# Altium PCB gecko3.PcbDoc (part 6 of 8)
Units mm, origin at the board's own origin, x right, y up, seen from the top; angles counter-clockwise.
Board outline 85.5 x 54.02 mm, 10 copper layers (Top Layer, MidLayer1, 1.2 & 2.5V Plane, GND Plane1, DDR layer 1, 3.3V Plane, DDR layer 2, GND Plane2, MidLayer2, Bottom Layer), stack 1.39 mm thick; 295 components, 567 nets, 2310 pads, 1568 vias.
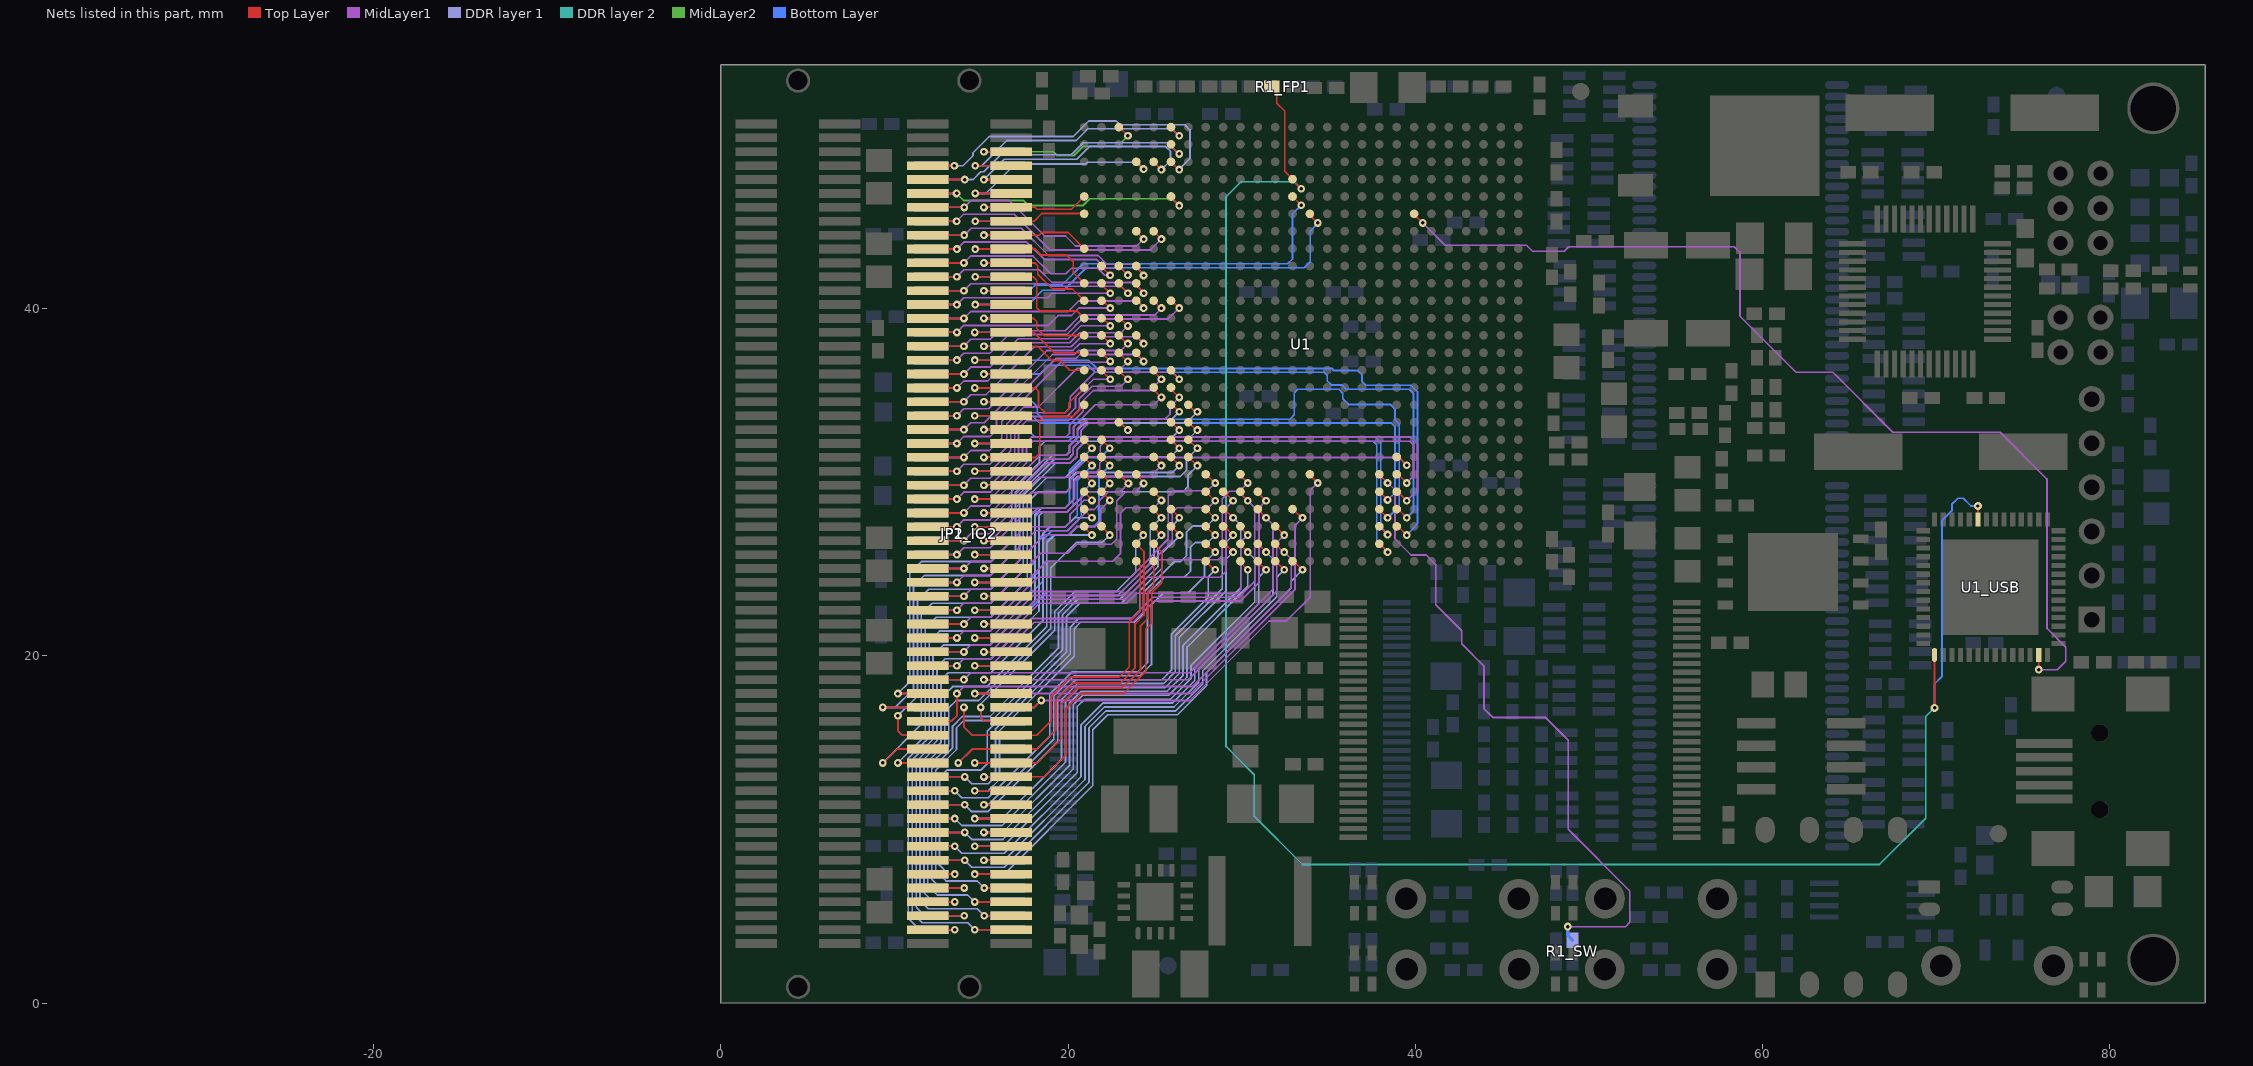
[diagram p14: the nets of this part, all layers, seen from the top]

## Via types
v1: diameter 0.45, hole 0.2, Top Layer to Bottom Layer, tented both sides, 1470 vias
v2: diameter 0.45, hole 0.2, Top Layer to Bottom Layer, tented bottom, 62 vias
v3: diameter 0.35, hole 0.15, Top Layer to MidLayer1, tented both sides, 26 vias
v4: diameter 0.45, hole 0.2, MidLayer2 to Bottom Layer, tented both sides, 10 vias

## Nets (pads, with @x,y where several pads share a name; then routed paths per layer and width w, separated by ;. In a path a pad name is that pad's centre, name@x,y a point inside that pad or via, vN(x,y) a via of type N, cw(c..) or ccw(c..) an arc to the next point about the centre after c; other vN are vias at no path point) (continued)
GPIO2_3: JP1_IO2.6 JP2_IO2.6 U1.AF24 | length 12.5
  Top Layer w0.1: v1(15.15,49.025) JP1_IO2.6@16.718,49.026 JP1_IO2.6@16.718,49.026 ; U1.AF24@22.927,50.449 22.951,50.449 v1(23.45,49.95)
  MidLayer2 w0.1: v1(15.15,49.025) 19.15,49.025 19.375,48.8 20.325,48.8 20.875,49.35 22.85,49.35 v1(23.45,49.95)
  Bottom Layer w0.1: v1(15.15,49.025) 16.517,49.025 JP2_IO2.6@16.518,49.026
GPIO2_4: JP1_IO2.7 JP2_IO2.7 U1.AD21 | length 21
  Top Layer w0.1: U1.AD21@25.927,48.448 v1@26.375,48
  Top Layer w0.15: JP1_IO2.7@11.918,48.226 v1(13.45,48.225)
  DDR layer 1 w0.1: v1(13.45,48.225) 13.95,48.225 14.525,48.8 14.525,48.975 15.452,49.903 20.303,49.903 21.2,50.8 22.775,50.8 23,50.575 26.725,50.575 27.025,50.275 27.025,48.65 v1@26.375,48
  Bottom Layer w0.15: JP2_IO2.7@12.118,48.226 v1(13.45,48.225)
  other v1: 26.4,48
GPIO2_5: JP1_IO2.8 JP2_IO2.8 U1.AF21 | length 17.4
  Top Layer w0.1: v1(14.65,48.225) JP1_IO2.8@16.718,48.226 ; U1.AF21@25.927,50.449 25.927,50.398 v1@26.375,49.95
  DDR layer 1 w0.1: v1(14.65,48.225) 15.025,48.225 16.478,49.678 20.478,49.678 21.15,50.35 25.975,50.35 v1@26.375,49.95
  Bottom Layer w0.1: v1(14.65,48.225) JP2_IO2.8@16.518,48.226
  other v1: 26.4,49.95
GPIO2_6: JP1_IO2.9 JP2_IO2.9 U1.AE21 | length 18.3
  Top Layer w0.1: JP1_IO2.9@11.918,47.426 v1(14.05,47.425) ; U1.AE21@25.927,49.449 25.927,49.373 v1(26.4,48.9)
  DDR layer 1 w0.1: v1(14.05,47.425) 14.525,47.425 14.975,47.875 15.15,47.875 16.125,48.85 20.175,48.85 20.875,49.55 25.725,49.55 v1@26.375,48.9
  Bottom Layer w0.1: JP2_IO2.9@12.118,47.426 v1(14.05,47.425)
GPIO2_7: JP1_IO2.10 JP2_IO2.10 U1.AD22 | length 16.5
  Top Layer w0.1: U1.AD22@24.927,48.448 v1(25.375,48) v1@25.375,48.001 ; v1@25.399,48.025 v1@25.425,48
  Top Layer w0.15: v1(15.15,47.425) JP1_IO2.10@16.718,47.426
  DDR layer 1 w0.1: v1(15.15,47.425) 16.325,48.6 20.5,48.6 21.225,49.325 25.632,49.325 25.9,49.057 25.9,48.525 v1(25.375,48)
  Bottom Layer w0.15: v1(15.15,47.425) JP2_IO2.10@16.518,47.426
GPIO2_8: JP1_IO2.11 JP2_IO2.11 U1.AB21 | length 17.3
  Top Layer w0.1: JP1_IO2.11@11.918,46.626 JP1_IO2.11@11.918,46.626 v1(13.575,46.625) ; U1.AB21@25.927,46.449 25.927,46.398 v1(26.4,45.925)
  MidLayer2 w0.1: v1(13.575,46.625) 13.975,46.225 17.425,46.225 17.725,45.925 20.85,45.925 21.25,46.325 26,46.325 v1(26.4,45.925)
  Bottom Layer w0.1: JP2_IO2.11@12.118,46.626 12.119,46.625 v1(13.575,46.625)
GPIO2_9: JP1_IO2.12 JP2_IO2.12 U1.AD23 | length 15.1
  Top Layer w0.1: v1(14.65,46.625) JP1_IO2.12@16.718,46.626 ; U1.AD23@23.927,48.449 23.931,48.449 v1@24.35,48.03
  DDR layer 1 w0.1: v1(14.65,46.625) 15.25,46.625 16.95,48.325 21.025,48.325 21.128,48.428 23.947,48.428 v1(24.35,48.025)
  Bottom Layer w0.1: v1(14.65,46.625) JP2_IO2.12@16.518,46.626
GPIO2_10: JP1_IO2.13 JP2_IO2.13 U1.Y23 | length 16.4
  Top Layer w0.1: JP1_IO2.13@11.918,45.826 JP1_IO2.13@11.918,45.826 v1(14.025,45.825) ; U1.Y23@23.927,44.449 23.927,44.423 v1(24.35,44)
  MidLayer1 w0.1: v1(14.025,45.825) 14.425,46.225 16.6,46.225 18.647,44.178 19.852,44.178 20.43,43.6 23.95,43.6 v1(24.35,44)
  Bottom Layer w0.1: JP2_IO2.13@12.118,45.826 12.119,45.825 v1(14.025,45.825)
GPIO2_11: JP1_IO2.14 JP2_IO2.14 U1.AB26 | length 7.5
  Top Layer w0.1: v1(15.15,45.825) v1(15.15,45.825) JP1_IO2.14@16.718,45.826 16.719,45.825 18.1,45.825 18.209,45.716 20.194,45.716 U1.AB26@20.927,46.449
  Bottom Layer w0.1: v1(15.15,45.825) 16.517,45.825 JP2_IO2.14@16.518,45.826
GPIO2_12: JP1_IO2.15 JP2_IO2.15 U1.Y22 | length 16.9
  Top Layer w0.1: JP1_IO2.15@11.918,45.026 JP1_IO2.15@11.918,45.026 v1(13.575,45.025) ; U1.Y22@24.927,44.449 v1(25.375,44) ; U1.Y22@24.927,44.449 U1.Y22@24.976,44.449
  MidLayer1 w0.1: v1(13.575,45.025) 13.975,45.425 16.9,45.425 18.95,43.375 24.75,43.375 v1(25.375,44)
  Bottom Layer w0.1: JP2_IO2.15@12.118,45.026 12.119,45.025 v1(13.575,45.025)
GPIO2_13: JP1_IO2.16 JP2_IO2.16 U1.AA26 | length 8.3
  Top Layer w0.1: v1(14.65,45.025) 14.651,45.026 JP1_IO2.16@16.718,45.026 16.719,45.025 18.05,45.025 18.5,45.475 U1.AA26@20.952,45.475 ; U1.AA26@20.927,45.449 U1.AA26@20.952,45.449
  Bottom Layer w0.1: v1(14.65,45.025) JP2_IO2.16@16.475,45.025
GPIO2_14: JP1_IO2.17 JP2_IO2.17 U1.V23 | length 16.4
  Top Layer w0.1: JP1_IO2.17@11.918,44.226 JP1_IO2.17@11.918,44.226 v1(14.025,44.225) ; U1.V23@23.902,42.398 v1@24.39,41.91
  MidLayer1 w0.1: v1(14.025,44.225) 14.425,44.625 17.3,44.625 18.872,43.053 21.727,43.053 22.23,42.55 23.75,42.55 v1@24.39,41.91
  Bottom Layer w0.1: v1(14.025,44.225) JP2_IO2.17@12.119,44.225 ; JP2_IO2.17@12.118,44.226 JP2_IO2.17@12.119,44.225
  other v1: 24.35,41.9
GPIO2_15: JP1_IO2.18 JP2_IO2.18 U1.W26 | length 7.6
  Top Layer w0.1: v1(15.15,44.225) v1(15.15,44.225) JP1_IO2.18@16.718,44.226 ; U1.W26@20.927,43.449 20.001,44.375 18.475,44.375 18.325,44.225 JP1_IO2.18@16.719,44.225 ; JP1_IO2.18@16.718,44.226 JP1_IO2.18@16.719,44.225
  Bottom Layer w0.1: v1(15.15,44.225) v1(15.15,44.225) JP2_IO2.18@16.518,44.226
GPIO2_16: JP1_IO2.19 JP2_IO2.19 U1.V24 | length 14.7
  Top Layer w0.1: JP1_IO2.19@11.918,43.426 JP1_IO2.19@11.918,43.426 v1(13.6,43.425) ; U1.V24@22.927,42.448 v1(23.45,41.925)
  MidLayer1 w0.1: v1@13.625,43.45 14,43.825 17.625,43.825 18.622,42.828 21.627,42.828 22.13,42.325 23.05,42.325 v1(23.45,41.925)
  Bottom Layer w0.1: JP2_IO2.19@12.118,43.426 v1@13.599,43.426
GPIO2_17: JP1_IO2.20 JP2_IO2.20 U1.U26 | length 9.3
  Top Layer w0.1: v1(14.65,43.425) 14.651,43.426 18.099,43.426 18.45,43.075 19.925,43.075 20.3,42.7 20.3,42.076 U1.U26@20.927,41.449
  Bottom Layer w0.1: v1(14.65,43.425) JP2_IO2.20@16.517,43.425 ; JP2_IO2.20@16.517,43.425 JP2_IO2.20@16.518,43.426
GPIO2_18: JP1_IO2.21 JP2_IO2.21 U1.V25 | length 14
  Top Layer w0.1: JP1_IO2.21@11.918,42.626 JP1_IO2.21@11.918,42.626 v1(14,42.625) ; U1.V25@21.927,42.398 v1(22.415,41.91)
  MidLayer1 w0.1: v1(14,42.625) 14.4,43.025 17.975,43.025 19,42 19.875,42 20.2,42.325 21.7,42.325 22.115,41.91 v1(22.415,41.91)
  Bottom Layer w0.1: v1(14,42.625) JP2_IO2.21@12.119,42.625 ; JP2_IO2.21@12.118,42.626 JP2_IO2.21@12.119,42.625
GPIO2_19: JP1_IO2.22 JP2_IO2.22 U1.T26 | length 8.3
  Top Layer w0.1: v1(15.15,42.625) JP1_IO2.22@16.718,42.626 JP1_IO2.22@16.718,42.626 18.074,42.626 18.25,42.45 18.25,41.974 19.099,41.125 20.251,41.125 U1.T26@20.927,40.449
  Bottom Layer w0.1: v1(15.15,42.625) JP2_IO2.22@16.518,42.626
GPIO2_20: JP1_IO2.23 JP2_IO2.23 U1.U23 | length 15.5
  Top Layer w0.1: JP1_IO2.23@11.918,41.826 JP1_IO2.23@11.918,41.826 v1(13.6,41.825) ; U1.U23@23.927,41.449 23.927,41.348 v1@24.4,40.875
  MidLayer1 w0.1: v1(13.6,41.825) 14,42.225 18.35,42.225 19.075,41.5 23.775,41.5 v1@24.4,40.875
  Bottom Layer w0.1: JP2_IO2.23@12.118,41.826 12.119,41.825 v1(13.6,41.825)
  other v1: 24.35,40.875
GPIO2_21: JP1_IO2.24 JP2_IO2.24 U1.R26 | length 10.1
  Top Layer w0.1: v1(14.65,41.825) 14.651,41.826 17.999,41.826 18.2,41.625 18.2,40.05 18.4,39.85 20.526,39.85 U1.R26@20.927,39.449
  Bottom Layer w0.1: v1(14.65,41.825) 14.651,41.826 JP2_IO2.24@16.518,41.826
GPIO2_22: JP1_IO2.25 JP2_IO2.25 U1.U24 | length 14.6
  Top Layer w0.1: JP1_IO2.25@11.918,41.026 JP1_IO2.25@11.918,41.026 v1(14,41.025) ; U1.U24@22.927,41.449 22.927,41.398 v1(23.45,40.875)
  MidLayer1 w0.1: v1(14,41.025) 14.4,41.425 18.825,41.425 18.975,41.275 23.05,41.275 v1(23.45,40.875)
  Bottom Layer w0.1: JP2_IO2.25@12.118,41.026 12.119,41.025 v1(14,41.025)
GPIO2_23: JP1_IO2.26 JP2_IO2.26 U1.AB14 | length 24.1
  Top Layer w0.1: v1(15.15,41.025) JP1_IO2.26@16.718,41.026 JP1_IO2.26@16.718,41.026 ; U1.AB14@32.926,46.449 v1(33.425,45.95)
  Bottom Layer w0.1: v1(15.15,41.025) 17.775,41.025 18.1,41.35 19.65,41.35 20.875,42.575 32.65,42.575 32.925,42.85 32.925,45.45 v1(33.425,45.95) ; JP2_IO2.26@16.518,41.026 JP2_IO2.26@16.518,41.026
GPIO2_24: JP1_IO2.27 JP2_IO2.27 U1.U25 | length 12.9
  Top Layer w0.1: JP1_IO2.27@11.918,40.226 JP1_IO2.27@11.918,40.226 v1(13.6,40.225) ; U1.U25@21.952,41.348 v1(22.425,40.875)
  MidLayer1 w0.1: v1(13.6,40.225) 14,40.625 18.825,40.625 19.075,40.875 v1(22.425,40.875)
  Bottom Layer w0.1: JP2_IO2.27@12.118,40.226 12.119,40.225 v1(13.6,40.225)
GPIO2_25: JP1_IO2.28 JP2_IO2.28 U1.AA13 | length 25.5
  Top Layer w0.1: v1(14.65,40.225) 14.651,40.226 JP1_IO2.28@16.718,40.226 ; U1.AA13@33.927,45.449 33.927,45.373 v1(34.375,44.925)
  Bottom Layer w0.1: v1(14.65,40.225) 17.7,40.225 18.525,41.05 19.75,41.05 21.05,42.35 33.6,42.35 33.95,42.7 33.95,44.45 v1(34.375,44.925) ; JP2_IO2.28@16.518,40.226 JP2_IO2.28@16.518,40.226
GPIO2_26: JP1_IO2.29 JP2_IO2.29 U1.T23 | length 15.6
  Top Layer w0.1: JP1_IO2.29@11.918,39.426 JP1_IO2.29@11.918,39.426 v1(14,39.425) ; U1.T23@23.927,40.449 23.976,40.449 v1@24.4,40.025
  MidLayer1 w0.1: v1(14,39.425) 14.4,39.825 20,39.825 20.6,40.425 24,40.425 v1@24.4,40.025
  Bottom Layer w0.1: JP2_IO2.29@12.118,39.426 12.119,39.425 v1(14,39.425)
  other v1: 24.35,40.025
GPIO2_27: JP1_IO2.30 JP2_IO2.30 U1.P26 | length 7.8
  Top Layer w0.1: v1(15.15,39.425) JP1_IO2.30@16.718,39.426 JP1_IO2.30@16.718,39.426 18.024,39.426 18.2,39.25 18.2,38.85 18.601,38.449 U1.P26@20.927,38.449
  Bottom Layer w0.1: v1(15.15,39.425) JP2_IO2.30@16.518,39.426
GPIO2_28: JP1_IO2.31 JP2_IO2.31 U1.T25 | length 13.2
  Top Layer w0.1: JP1_IO2.31@11.918,38.626 JP1_IO2.31@11.918,38.626 v1(13.6,38.625) ; U1.T25@21.927,40.449 22.001,40.449 v1(22.425,40.025)
  MidLayer1 w0.1: v1(13.6,38.625) 14,39.025 18.85,39.025 19.425,39.6 20.2,39.6 20.625,40.025 v1(22.425,40.025)
  Bottom Layer w0.1: JP2_IO2.31@12.118,38.626 12.119,38.625 v1(13.6,38.625)
GPIO2_29: JP1_IO2.32 JP2_IO2.32 U1.N26 | length 8.7
  Top Layer w0.1: v1(14.623,38.625) 14.649,38.626 JP1_IO2.32@16.718,38.626 16.719,38.625 18.025,38.625 19.201,37.449 U1.N26@20.927,37.449
  Bottom Layer w0.1: v1(14.623,38.625) 16.517,38.625 JP2_IO2.32@16.518,38.626
GPIO2_30: JP1_IO2.33 JP2_IO2.33 U1.T22 | length 17
  Top Layer w0.1: JP1_IO2.33@11.918,37.826 JP1_IO2.33@11.918,37.826 v1(14,37.825) ; U1.T22@25.001,40.449 U1.T22@24.927,40.449 25.351,40.025 v1@25.425,40.025
  MidLayer1 w0.1: v1(14,37.825) 14.4,38.225 15.525,38.225 16.025,38.725 19.832,38.725 20.732,39.625 25,39.625 25.398,40 v1@25.425,40.025
  Bottom Layer w0.1: JP2_IO2.33@12.118,37.826 12.119,37.825 v1(14,37.825)
  other v1: 25.375,40.025
GPIO2_31: JP1_IO2.34 JP2_IO2.34 U1.M26 | length 7.8
  Top Layer w0.1: v1(15.15,37.825) JP1_IO2.34@16.718,37.826 JP1_IO2.34@16.718,37.826 JP1_IO2.34@16.762,37.782 ; JP1_IO2.34@16.719,37.825 18.25,37.825 19.075,37 19.55,37 20.101,36.449 U1.M26@20.927,36.449
  Bottom Layer w0.1: v1(15.15,37.825) JP2_IO2.34@16.518,37.826
GPIO2_32: JP1_IO2.35 JP2_IO2.35 U1.T21 | length 17.9
  Top Layer w0.1: JP1_IO2.35@11.918,37.026 JP1_IO2.35@11.918,37.026 v1(13.6,37.025) ; U1.T21@25.927,40.449 25.976,40.449 v1(26.4,40.025)
  MidLayer1 w0.1: v1(13.6,37.025) 14,37.425 15.5,37.425 16.575,38.5 19.925,38.5 20.825,39.4 25.775,39.4 v1(26.4,40.025)
  Bottom Layer w0.1: JP2_IO2.35@12.118,37.026 12.119,37.025 v1(13.6,37.025)
GPIO2_33: JP1_IO2.36 JP2_IO2.36 U1.C8 | length 37.9
  Top Layer w0.1: v1(14.625,37.025) JP1_IO2.36@16.718,37.026 JP1_IO2.36@16.718,37.026 ; U1.C8@38.927,27.449 39.001,27.449 v1(39.5,26.95)
  Bottom Layer w0.1: v1(14.625,37.025) 16.517,37.025 JP2_IO2.36@16.518,37.026 ; JP2_IO2.36@16.494,37.05 16.519,37.025 21.175,37.025 21.65,36.55 35.175,36.55 35.3,36.425 36.675,36.425 36.925,36.175 36.925,35.8 37.15,35.575 39.75,35.575 40.125,35.2 40.125,27.6 v1(39.5,26.95)
GPIO2_34: JP1_IO2.37 JP2_IO2.37 U1.R25 | length 14.2
  Top Layer w0.1: JP1_IO2.37@11.918,36.226 11.919,36.225 v1(14,36.225) ; U1.R25@21.927,39.449 21.976,39.449 v1(22.425,39)
  MidLayer1 w0.1: v1(14,36.225) 14.4,36.625 15.5,36.625 17.13,38.255 19.998,38.255 20.743,39 v1(22.425,39)
  Bottom Layer w0.1: JP2_IO2.37@12.118,36.226 12.119,36.225 v1(14,36.225)
GPIO2_35: JP1_IO2.38 JP2_IO2.38 U1.D8 | length 35.5
  Top Layer w0.1: v1(15.15,36.225) 16.717,36.225 JP1_IO2.38@16.718,36.226 ; U1.D8@38.927,28.449 39.001,28.449 v1(39.5,27.95)
  Bottom Layer w0.1: v1(15.15,36.225) 18.375,36.225 18.875,36.725 21.157,36.725 21.557,36.325 34.75,36.325 34.925,36.15 34.925,35.825 35.15,35.6 35.775,35.6 36.025,35.35 39.65,35.35 39.9,35.1 39.9,28.35 v1(39.5,27.95) ; JP2_IO2.38@16.518,36.226 JP2_IO2.38@16.519,36.225
GPIO2_36: JP1_IO2.39 JP2_IO2.39 U1.R24 | length 15.2
  Top Layer w0.1: JP1_IO2.39@11.918,35.426 11.919,35.425 v1(13.6,35.425) ; U1.R24@22.927,39.449 22.976,39.449 v1@23.425,39
  MidLayer1 w0.1: v1(13.6,35.425) 14,35.825 15.375,35.825 17.578,38.028 20.089,38.028 20.661,38.6 23.05,38.6 v1(23.45,39)
  Bottom Layer w0.1: JP2_IO2.39@12.118,35.426 12.119,35.425 v1(13.6,35.425)
GPIO2_37: JP1_IO2.40 JP2_IO2.40 U1.L26 | length 10.1
  Top Layer w0.1: v1(14.625,35.425) 15.126,35.426 JP1_IO2.40@16.718,35.426 16.719,35.425 18.1,35.425 18.3,35.225 18.3,34.375 18.675,34 19.85,34 20.05,34.2 20.05,34.572 U1.L26@20.927,35.449
  Bottom Layer w0.1: v1(14.625,35.425) 16.517,35.425 JP2_IO2.40@16.518,35.426
GPIO2_38: JP1_IO2.41 JP2_IO2.41 U1.P23 | length 16.7
  Top Layer w0.1: JP1_IO2.41@11.918,34.626 11.919,34.625 v1(14,34.625) ; U1.P23@23.927,38.448 v1@24.4,37.975
  MidLayer1 w0.1: v1(14,34.625) 14.4,35.025 15.275,35.025 18.053,37.803 20.182,37.803 20.755,38.375 23.95,38.375 v1(24.35,37.975)
  Bottom Layer w0.1: v1(14,34.625) JP2_IO2.41@12.119,34.625 ; JP2_IO2.41@12.118,34.626 JP2_IO2.41@12.119,34.625
GPIO2_39: JP1_IO2.42 JP2_IO2.42 U1.D9 | length 35.4
  Top Layer w0.1: v1(15.15,34.625) 15.126,34.626 JP1_IO2.42@16.718,34.626 ; U1.D9@37.927,28.449 37.927,28.423 v1(38.4,27.95)
  Bottom Layer w0.1: v1(15.15,34.625) JP2_IO2.42@16.517,34.625 ; v1(38.4,27.95) 39.075,28.625 39.075,33.35 38.825,33.6 38.825,34.2 38.55,34.475 36.15,34.475 35.825,34.8 35.825,35.125 35.6,35.35 33.225,35.35 33.025,35.15 33.025,33.875 32.778,33.628 18.547,33.628 18.225,33.95 18.225,34.35 17.95,34.625 16.519,34.625 JP2_IO2.42@16.518,34.626 ; JP2_IO2.42@16.517,34.625 JP2_IO2.42@16.518,34.626
GPIO2_40: JP1_IO2.43 JP2_IO2.43 U1.P25 | length 14.4
  Top Layer w0.1: JP1_IO2.43@11.918,33.826 11.919,33.825 v1(13.6,33.825) ; U1.P25@21.927,38.449 21.951,38.449 v1(22.425,37.975)
  MidLayer1 w0.1: v1(13.6,33.825) 14,34.225 15.425,34.225 18.778,37.578 20.277,37.578 20.675,37.975 v1(22.425,37.975)
  Bottom Layer w0.1: v1(13.6,33.825) JP2_IO2.43@12.119,33.825 ; JP2_IO2.43@12.118,33.826 JP2_IO2.43@12.119,33.825
GPIO2_41: JP1_IO2.44 JP2_IO2.44 U1.E9 | length 31.6
  Top Layer w0.1: v1@14.625,33.826 JP1_IO2.44@16.718,33.826 ; U1.E9@37.927,29.449 v1(38.4,28.975)
  Bottom Layer w0.1: v1(14.625,33.825) JP2_IO2.44@16.518,33.826 16.519,33.825 17.95,33.825 18.372,33.403 38.622,33.403 38.825,33.2 38.825,29.375 v1(38.4,28.975)
GPIO2_42: JP1_IO2.45 JP2_IO2.45 U1.P24 | length 16.1
  Top Layer w0.1: JP1_IO2.45@11.918,33.026 11.919,33.025 v1(14,33.025) ; U1.P24@22.927,38.449 23.401,37.975 v1@23.425,37.975
  MidLayer1 w0.1: v1(14,33.025) 14.4,33.425 15.175,33.425 19.1,37.35 20.368,37.35 20.593,37.575 23.025,37.575 v1@23.425,37.975
  Bottom Layer w0.1: v1(14,33.025) JP2_IO2.45@12.119,33.025 ; JP2_IO2.45@12.118,33.026 JP2_IO2.45@12.119,33.025
  other v1: 23.45,37.975
GPIO2_43: JP1_IO2.46 JP2_IO2.46 U1.C9 | length 30.9
  Top Layer w0.1: v1(15.15,33.025) 16.717,33.025 JP1_IO2.46@16.718,33.026 ; U1.C9@37.927,27.449 v1(38.4,26.975)
  Bottom Layer w0.1: v1@15.151,33.026 17.649,33.026 18.075,32.6 37.675,32.6 38,32.275 38,27.4 v1(38.4,26.975)
GPIO2_44: JP1_IO2.47 JP2_IO2.47 U1.N23 | length 17.3
  Top Layer w0.1: JP1_IO2.47@11.918,32.226 11.919,32.225 v1(13.6,32.225) ; U1.N23@23.927,37.449 23.927,37.423 v1@24.4,36.95
  MidLayer1 w0.1: v1(13.6,32.225) 14,32.625 15.525,32.625 15.875,32.975 15.875,33.675 19.325,37.125 20.461,37.125 20.686,37.35 23.95,37.35 v1(24.35,36.95)
  Bottom Layer w0.1: v1(13.6,32.225) JP2_IO2.47@12.119,32.225 ; JP2_IO2.47@12.118,32.226 JP2_IO2.47@12.119,32.225
GPIO2_45: JP1_IO2.48 JP2_IO2.48 U1.B9 | length 32.5
  Top Layer w0.1: JP1_IO2.48@16.717,32.225 v1(14.625,32.225) ; U1.B9@37.927,26.449 v1(38.4,25.975) ; v1(14.625,32.225) v1@14.626,32.226
  Bottom Layer w0.1: v1(14.625,32.225) 16.517,32.225 16.642,32.35 37.575,32.35 37.775,32.15 37.775,26.625 v1(38.4,25.975)
GPIO2_46: JP1_IO2.49 JP2_IO2.49 U1.N25 | length 16
  Top Layer w0.1: JP1_IO2.49@11.918,31.426 11.919,31.425 v1(14,31.425) ; U1.N25@21.927,37.449 v1(22.425,36.95)
  MidLayer1 w0.1: v1(14,31.425) 14.4,31.825 15.475,31.825 16.175,32.525 16.175,33.5 19.575,36.9 22.375,36.9 v1(22.425,36.95)
  Bottom Layer w0.1: JP2_IO2.49@12.118,31.426 12.119,31.425 v1(14,31.425)
GPIO2_47: JP1_IO2.50 JP2_IO2.50 U1.K26 | length 9.6
  Top Layer w0.1: v1(15.15,31.425) 15.125,31.45 16.694,31.45 16.719,31.425 18.125,31.425 18.375,31.675 18.375,33.575 18.575,33.775 20.275,33.775 20.927,34.427 U1.K26@20.927,34.449
  Bottom Layer w0.1: v1(15.15,31.425) JP2_IO2.50@16.518,31.426
GPIO2_48: JP1_IO2.51 JP2_IO2.51 U1.N24 | length 17.1
  Top Layer w0.1: JP1_IO2.51@11.918,30.626 11.919,30.625 v1(13.6,30.625) ; U1.N24@22.952,37.423 v1@23.425,36.95
  MidLayer1 w0.1: v1(13.6,30.625) 14,31.025 15.5,31.025 16.475,32 16.475,33.35 17.45,34.325 18.3,34.325 20.525,36.55 23.05,36.55 v1(23.45,36.95)
  Bottom Layer w0.1: JP2_IO2.51@12.118,30.626 12.119,30.625 v1(13.6,30.625)
GPIO2_49: JP1_IO2.52 JP2_IO2.52 U1.M21 | length 20.2
  Top Layer w0.1: v1(14.625,30.625) 16.717,30.625 JP1_IO2.52@16.718,30.626 ; U1.M21@25.927,36.449 25.927,36.398 v1(26.4,35.925)
  MidLayer1 w0.1: v1(14.625,30.625) 15.525,30.625 16.7,31.8 16.7,33.257 17.443,34 19.825,34 20.127,34.302 20.127,34.907 21.545,36.325 26,36.325 v1(26.4,35.925)
  Bottom Layer w0.1: v1(14.625,30.625) 16.517,30.625 JP2_IO2.52@16.518,30.626
GPIO2_50: JP1_IO2.53 JP2_IO2.53 U1.M25 | length 16.9
  Top Layer w0.1: JP1_IO2.53@11.918,29.826 11.919,29.825 v1(14,29.825) ; U1.M25@21.927,36.449 21.927,36.423 v1(22.425,35.925)
  MidLayer1 w0.1: v1(14,29.825) 14.4,30.225 15.5,30.225 16.925,31.65 16.925,33.164 17.536,33.775 19.925,33.775 20.425,34.275 20.425,34.886 21.464,35.925 v1(22.425,35.925)
  Bottom Layer w0.1: JP2_IO2.53@12.118,29.826 12.119,29.825 v1(14,29.825)
GPIO2_51: JP1_IO2.54 JP2_IO2.54 U1.M24 | length 15.8
  Top Layer w0.1: v1(15.15,29.825) 16.717,29.825 JP1_IO2.54@16.718,29.826 ; U1.M24@22.927,36.449 22.927,36.423 v1@23.425,35.925
  MidLayer1 w0.1: v1(15.15,29.825) 15.174,29.849 15.549,29.849 17.15,31.45 17.15,33.07 17.63,33.55 20.025,33.55 20.65,34.175 20.65,34.793 21.382,35.525 23.05,35.525 v1(23.45,35.925)
  Bottom Layer w0.1: v1(15.15,29.825) 16.517,29.825 JP2_IO2.54@16.518,29.826
GPIO2_52: JP1_IO2.55 JP2_IO2.55 U1.M22 | length 19.6
  Top Layer w0.1: JP1_IO2.55@11.918,29.026 JP1_IO2.55@11.918,29.026 v1(13.6,29.025) ; U1.M22@24.927,36.449 24.927,36.373 v1(25.375,35.925)
  MidLayer1 w0.1: v1(13.6,29.025) 14,29.425 15.525,29.425 17.375,31.275 17.375,32.075 17.9,32.6 19.875,32.6 20.075,32.8 20.075,33.275 20.875,34.075 20.875,34.7 21.45,35.275 24.725,35.275 v1(25.375,35.925)
  Bottom Layer w0.1: JP2_IO2.55@12.118,29.026 12.119,29.025 v1(13.6,29.025)
GPIO2_53: JP1_IO2.56 JP2_IO2.56 U1.L22 | length 18.7
  Top Layer w0.1: v1(14.625,29.025) JP1_IO2.56@16.718,29.026 JP1_IO2.56@16.718,29.026 ; U1.L22@24.927,35.449 24.927,35.323 v1(25.375,34.875)
  MidLayer1 w0.1: v1(14.625,29.025) 15.525,29.025 17.6,31.1 17.6,31.982 17.968,32.35 20,32.35 20.3,32.65 20.3,33.175 21.575,34.45 24.95,34.45 v1(25.375,34.875)
  Bottom Layer w0.1: v1(14.625,29.025) JP2_IO2.56@16.518,29.026
GPIO2_54: JP1_IO2.57 JP2_IO2.57 U1.L21 | length 20.7
  Top Layer w0.1: JP1_IO2.57@11.918,28.226 JP1_IO2.57@11.918,28.226 v1(14,28.225) ; U1.L21@25.927,35.449 25.927,35.348 v1(26.4,34.875)
  MidLayer1 w0.1: v1(14,28.225) 14.4,28.625 15.475,28.625 18.4,31.55 19.9,31.55 20.075,31.725 20.075,32.1 20.525,32.55 20.525,33.082 21.068,33.625 25.575,33.625 25.875,33.925 25.875,34.35 v1(26.4,34.875)
  Bottom Layer w0.1: JP2_IO2.57@12.118,28.226 12.119,28.225 v1(14,28.225)
GPIO2_55: JP1_IO2.58 JP2_IO2.58 U1.J24 | length 14.8
  Top Layer w0.1: v1(15.15,28.225) JP1_IO2.58@16.718,28.226 JP1_IO2.58@16.718,28.226 ; U1.J24@22.927,33.449 22.976,33.449 v1@23.425,33
  MidLayer1 w0.1: v1(15.15,28.225) 15.525,28.225 18.625,31.325 20.025,31.325 20.3,31.6 20.3,32 20.75,32.45 20.75,32.989 21.161,33.4 23.05,33.4 v1(23.45,33)
  Bottom Layer w0.1: v1(15.15,28.225) 16.517,28.225 JP2_IO2.58@16.518,28.226
GPIO2_56: JP1_IO2.59 JP2_IO2.59 U1.E8 | length 36.6
  Top Layer w0.1: JP1_IO2.59@11.918,27.426 JP1_IO2.59@11.918,27.426 v1(13.6,27.425) ; U1.E8@38.927,29.449 38.976,29.449 v1(39.5,28.925)
  MidLayer1 w0.1: v1(13.6,27.425) 14,27.825 15.5,27.825 18.775,31.1 20.125,31.1 20.525,31.5 20.525,31.9 21.225,32.6 39.75,32.6 40.125,32.225 40.125,29.55 v1(39.5,28.925)
  Bottom Layer w0.1: JP2_IO2.59@12.118,27.426 12.119,27.425 v1(13.6,27.425)
GPIO2_57: JP1_IO2.60 JP2_IO2.60 U1.F8 | length 34.8
  Top Layer w0.1: v1(14.625,27.425) JP1_IO2.60@16.718,27.426 JP1_IO2.60@16.718,27.426 ; U1.F8@38.927,30.449 39.001,30.449 v1(39.5,29.95)
  MidLayer1 w0.1: v1(14.625,27.425) 15.475,27.425 18.325,30.275 19.95,30.275 21.125,31.45 21.675,31.45 21.85,31.625 21.85,32.075 22.128,32.353 39.677,32.353 39.9,32.13 39.9,30.375 v1(39.5,29.95)
  Bottom Layer w0.1: v1(14.625,27.425) JP2_IO2.60@16.518,27.426
GPIO2_58: JP1_IO2.61 JP2_IO2.61 U1.G8 | length 32.9
  Top Layer w0.1: JP1_IO2.61@11.892,26.6 JP1_IO2.61@11.918,26.626 ; JP1_IO2.61@11.918,26.626 v1(14,26.625) ; U1.G8@38.927,31.449 39.026,31.449 v1(39.5,30.975)
  MidLayer1 w0.1: v1(14,26.625) 14.4,27.025 15.475,27.025 17.85,29.4 19.875,29.4 20.15,29.675 20.15,30.157 20.543,30.55 21.6,30.55 21.825,30.775 21.825,31.1 22.15,31.425 39.05,31.425 v1(39.5,30.975)
  Bottom Layer w0.1: JP2_IO2.61@12.118,26.626 v1(14,26.625)
GPIO2_59: JP1_IO2.62 JP2_IO2.62 U1.G22 | length 16.3
  Top Layer w0.1: v1(15.15,26.625) JP1_IO2.62@16.718,26.626 JP1_IO2.62@16.718,26.626 ; U1.G22@24.927,31.449 v1@25.425,30.951
  MidLayer1 w0.1: v1(15.15,26.625) 15.55,26.625 17.425,28.5 19.825,28.5 20.375,29.05 20.375,30.064 20.636,30.325 24.75,30.325 v1(25.375,30.95)
  Bottom Layer w0.1: v1(15.15,26.625) 16.517,26.625 JP2_IO2.62@16.518,26.626
GPIO2_60: JP1_IO2.63 JP2_IO2.63 U1.F25 | length 14.4
  Top Layer w0.1: JP1_IO2.63@11.918,25.826 11.917,25.825 v1(13.6,25.825) ; U1.F25@21.927,30.449 v1@22.425,29.951
  MidLayer1 w0.1: v1(13.6,25.825) 14,26.225 15.525,26.225 17.575,28.275 19.925,28.275 21.1,29.45 21.925,29.45 v1(22.4,29.925)
  Bottom Layer w0.1: JP2_IO2.63@12.118,25.826 v1(13.6,25.825)
GPIO2_61: JP1_IO2.64 JP2_IO2.64 U1.H26 | length 14.4
  Top Layer w0.1: v1(14.625,25.825) JP1_IO2.64@16.718,25.826 JP1_IO2.64@16.718,25.826 ; U1.H26@20.927,32.449 20.927,32.398 v1(21.375,31.95)
  Bottom Layer w0.1: v1(14.625,25.825) 16.517,25.825 JP2_IO2.64@16.518,25.826 17.651,25.826 17.875,26.05 17.875,28.125 18.25,28.5 19.825,28.5 20.077,28.752 20.077,30.652 v1(21.375,31.95)
GPIO2_62: JP1_IO2.65 JP2_IO2.65 U1.E26 | length 13.9
  Top Layer w0.1: JP1_IO2.65@11.918,25.026 v1(14,25.025) ; U1.E26@20.914,29.436 v1@21.4,28.951
  MidLayer1 w0.1: v1(14,25.025) 14.4,25.425 15.55,25.425 17.55,27.425 19.85,27.425 20.116,27.691 20.116,28.148 20.918,28.95 v1(21.375,28.95)
  Bottom Layer w0.1: JP2_IO2.65@12.118,25.026 JP2_IO2.65@12.118,25.026 ; JP2_IO2.65@12.118,25.026 v1(14,25.025)
GPIO2_63: JP1_IO2.66 JP2_IO2.66 U1.H25 | length 15
  Top Layer w0.1: v1(15.15,25.025) v1(15.15,25.025) JP1_IO2.66@16.718,25.026 ; U1.H25@21.927,32.449 v1@22.425,31.951
  Bottom Layer w0.1: v1(15.15,25.025) JP2_IO2.66@16.518,25.026 JP2_IO2.66@16.518,25.026 17.7,25.025 18.1,25.425 18.1,28.025 18.35,28.275 19.925,28.275 20.302,28.652 20.302,30.559 21.143,31.4 21.85,31.4 v1(22.4,31.95)
GPIO2_64: JP1_IO2.67 JP2_IO2.67 U1.F24 | length 16.3
  Top Layer w0.1: JP1_IO2.67@11.918,24.226 11.917,24.225 v1(13.6,24.225) ; U1.F24@22.927,30.449 22.951,30.449 v1(23.475,29.925)
  MidLayer1 w0.1: v1(13.6,24.225) 14,24.625 15.55,24.625 18.125,27.2 19.975,27.2 21.2,28.425 21.5,28.425 21.771,28.696 21.771,28.896 22.325,29.45 23,29.45 v1(23.475,29.925)
  Bottom Layer w0.1: JP2_IO2.67@12.118,24.226 JP2_IO2.67@12.118,24.226 v1(13.6,24.225)
GPIO2_65: JP1_IO2.68 JP2_IO2.68 U1.G26 | length 14.6
  Top Layer w0.1: v1(14.625,24.225) JP1_IO2.68@16.719,24.225 ; U1.G26@20.914,31.436 v1@21.4,30.951 ; JP1_IO2.68@16.718,24.226 JP1_IO2.68@16.719,24.225
  Bottom Layer w0.1: v1(14.625,24.225) 17.7,24.225 18.325,24.85 18.325,26.775 18.975,27.425 19.85,27.425 20.527,28.102 20.527,30.102 v1(21.375,30.95) ; JP2_IO2.68@16.518,24.226 JP2_IO2.68@16.518,24.226
GPIO2_66: JP1_IO2.69 JP2_IO2.69 U1.E25 | length 15.8
  Top Layer w0.1: JP1_IO2.69@11.918,23.426 v1(14,23.425) ; U1.E25@21.927,29.449 v1@22.425,28.951 ; v1(14,23.425) v1(14,23.425)
  MidLayer1 w0.1: v1(14,23.425) 14.4,23.825 15.5,23.825 18.65,26.975 20.075,26.975 20.55,27.45 21.575,27.45 21.875,27.75 21.875,28.425 v1(22.4,28.95)
  Bottom Layer w0.1: JP2_IO2.69@12.118,23.426 v1(14,23.425) ; v1(14,23.425) v1(14,23.425)
GPIO2_67: JP1_IO2.70 JP2_IO2.70 U1.F26 | length 13.4
  Top Layer w0.1: v1(15.15,23.425) JP1_IO2.70@16.718,23.426 JP1_IO2.70@16.718,23.426 ; U1.F26@20.914,30.436 v1@21.4,29.951
  Bottom Layer w0.1: v1(15.15,23.425) JP2_IO2.70@16.517,23.425 ; v1(21.375,29.925) 20.752,29.38 20.752,28.002 19.95,27.2 19.068,27.2 18.55,26.682 18.55,24.275 17.7,23.425 JP2_IO2.70@16.518,23.426 JP2_IO2.70@16.518,23.426 ; JP2_IO2.70@16.517,23.425 JP2_IO2.70@16.518,23.426
GPIO2_68: JP1_IO2.71 JP2_IO2.71 U1.F23 | length 18.9
  Top Layer w0.1: JP1_IO2.71@11.918,22.626 JP1_IO2.71@11.918,22.626 v1(13.6,22.625) ; U1.F23@23.927,30.449 v1@24.425,29.951
  MidLayer1 w0.1: v1(13.6,22.625) 14,23.025 15.55,23.025 18.425,25.9 19.975,25.9 20.5,26.425 22.5,26.425 22.8,26.725 22.8,28.932 23.318,29.45 23.875,29.45 v1(24.35,29.925)
  Bottom Layer w0.1: JP2_IO2.71@12.118,22.626 v1@13.599,22.626
GPIO2_69: JP1_IO2.72 JP2_IO2.72 U1.G25 | length 17.2
  Top Layer w0.1: v1(14.625,22.625) JP1_IO2.72@16.718,22.626 JP1_IO2.72@16.718,22.626 ; U1.G25@21.927,31.449 v1@22.413,30.963
  Bottom Layer w0.1: v1(14.625,22.625) JP2_IO2.72@16.517,22.625 ; v1(22.4,30.95) 21.775,30.325 21.775,27.725 21.5,27.45 20.518,27.45 20.043,26.975 19.161,26.975 18.775,26.589 18.775,23.675 17.725,22.625 JP2_IO2.72@16.518,22.626 JP2_IO2.72@16.518,22.626 ; JP2_IO2.72@16.517,22.625 JP2_IO2.72@16.518,22.626
GPIO2_70: JP1_IO2.73 JP2_IO2.73 U1.E22 | length 20.3
  Top Layer w0.1: JP1_IO2.73@11.918,21.826 11.917,21.825 v1(14,21.825) ; U1.E22@24.927,29.449 v1@25.4,28.975
  MidLayer1 w0.1: v1(14,21.825) 14.4,22.225 15.55,22.225 18.775,25.45 22.575,25.45 23.025,25.9 23.025,28.225 23.325,28.525 24.95,28.525 v1(25.375,28.95)
  Bottom Layer w0.1: JP2_IO2.73@12.118,21.826 v1(14,21.825)
GPIO2_71: JP1_IO2.74 JP2_IO2.74 U1.F19 | length 21.8
  Top Layer w0.1: v1(15.15,21.825) JP1_IO2.74@16.718,21.826 JP1_IO2.74@16.718,21.826 ; U1.F19@27.939,30.461 v1@28.463,29.938
  MidLayer1 w0.1: v1(15.15,21.825) 15.55,21.825 18.25,24.525 23.6,24.525 25.775,26.7 25.775,29.225 26.05,29.5 28.025,29.5 v1(28.475,29.95)
  Bottom Layer w0.1: v1(15.15,21.825) JP2_IO2.74@16.517,21.825 ; JP2_IO2.74@16.517,21.825 JP2_IO2.74@16.518,21.826
GPIO2_72: JP1_IO2.75 JP2_IO2.75 U1.E19 | length 23
  Top Layer w0.1: JP1_IO2.75@11.918,21.026 11.917,21.025 v1(13.6,21.025) ; U1.E19@27.939,29.436 v1@28.463,28.913
  MidLayer1 w0.1: v1(13.6,21.025) 14,21.425 15.55,21.425 17.825,23.7 23.1,23.7 26,26.6 26,28.25 26.275,28.525 28.075,28.525 v1(28.475,28.925)
  Bottom Layer w0.1: JP2_IO2.75@12.118,21.026 v1@13.599,21.026
GPIO2_73: JP1_IO2.76 JP2_IO2.76 U1.F17 | length 26
  Top Layer w0.1: v1(14.625,21.025) 16.719,21.025 JP1_IO2.76@16.718,21.026 ; U1.F17@29.852,30.448 v1(30.35,29.95)
  MidLayer1 w0.1: v1(14.625,21.025) 15.55,21.025 18,23.475 23.193,23.475 25.243,25.525 28.65,25.525 28.875,25.75 28.875,29.05 29.3,29.475 29.875,29.475 v1(30.35,29.95)
  Bottom Layer w0.1: v1@14.626,21.026 JP2_IO2.76@16.518,21.026
GPIO2_74: JP1_IO2.77 JP2_IO2.77 U1.E18 | length 26
  Top Layer w0.1: JP1_IO2.77@11.918,20.226 v1(14,20.225) v1(14,20.225) ; U1.E18@28.927,29.449 28.976,29.449 v1(29.5,28.925)
  MidLayer1 w0.1: v1(14,20.225) 14.4,20.625 15.55,20.625 18.175,23.25 23.286,23.25 24.561,24.525 28.75,24.525 29.1,24.875 29.1,28.525 v1(29.5,28.925)
  Bottom Layer w0.1: JP2_IO2.77@12.118,20.226 v1(14,20.225)
GPIO2_75: JP1_IO2.78 JP2_IO2.78 U1.C17 | length 23.2
  Top Layer w0.1: v1(15.15,20.225) JP1_IO2.78@16.718,20.226 JP1_IO2.78@16.718,20.226 ; U1.C17@29.927,27.449 29.927,27.373 v1(30.35,26.95)
  MidLayer1 w0.1: v1(15.15,20.225) 15.55,20.225 18.35,23.025 23.38,23.025 23.955,23.6 29.725,23.6 29.95,23.825 29.95,26.575 v1(30.35,26.95)
  Bottom Layer w0.1: v1(15.15,20.225) JP2_IO2.78@16.518,20.226 ; JP2_IO2.78@16.518,20.226 JP2_IO2.78@16.518,20.226
GPIO2_76: JP1_IO2.79 JP2_IO2.79 U1.E17 | length 27.8
  Top Layer w0.1: JP1_IO2.79@11.918,19.426 11.917,19.425 v1(13.6,19.425) ; U1.E17@29.852,29.423 v1(30.35,28.925)
  MidLayer1 w0.1: v1(13.6,19.425) 14,19.825 15.55,19.825 17.875,22.15 23.65,22.15 24.875,23.375 29.825,23.375 30.75,24.3 30.75,28.525 v1(30.35,28.925)
  Bottom Layer w0.1: JP2_IO2.79@12.118,19.426 JP2_IO2.79@12.118,19.426 v1(13.6,19.425)
GPIO2_77: JP1_IO2.80 JP2_IO2.80 U1.E16 | length 27.9
  Top Layer w0.1: v1(14.625,19.425) 16.719,19.425 JP1_IO2.80@16.718,19.426 ; U1.E16@30.902,29.423 v1(31.4,28.925)
  MidLayer1 w0.1: v1(14.625,19.425) 15.55,19.425 18.05,21.925 23.743,21.925 24.968,23.15 29.925,23.15 31,24.225 31,28.525 v1(31.4,28.925)
  Bottom Layer w0.1: v1(14.625,19.425) JP2_IO2.80@16.518,19.426 JP2_IO2.80@16.518,19.426
GPIO2_78: JP1_IO2.81 JP2_IO2.81 U1.D16 | length 28.9
  Top Layer w0.1: JP1_IO2.81@11.917,18.625 JP1_IO2.81@11.918,18.626 ; JP1_IO2.81@11.918,18.626 v1(14,18.625) ; U1.D16@30.902,28.448 30.914,28.436 v1(31.4,27.95)
  MidLayer1 w0.1: v1(14,18.625) 14.4,19.025 27,19.025 31.8,23.825 31.8,27.55 v1(31.4,27.95)
  Bottom Layer w0.1: JP2_IO2.81@12.118,18.626 v1(14,18.625) v1(14,18.625)
GPIO2_79: JP1_IO2.82 JP2_IO2.82 U1.C15 | length 26
  Top Layer w0.1: v1(15.15,18.625) JP1_IO2.82@16.718,18.626 JP1_IO2.82@16.718,18.626 ; U1.C15@31.952,27.448 v1(32.45,26.95)
  MidLayer1 w0.1: v1(15.15,18.625) 26.925,18.625 32.025,23.725 32.025,26.525 v1(32.45,26.95)
  Bottom Layer w0.1: v1(15.15,18.625) JP2_IO2.82@16.518,18.626 ; JP2_IO2.82@16.518,18.626 JP2_IO2.82@16.518,18.626
GPIO2_80: JP1_IO2.83 JP2_IO2.83 U1.K21 | length 33.4
  Top Layer w0.1: v1(10.2,17.825) 11.917,17.825 JP1_IO2.83@11.918,17.826 ; U1.K21@25.927,34.449 26.001,34.449 v1(26.4,34.05)
  DDR layer 1 w0.1: v1(10.2,17.825) 10.875,18.5 10.875,24.75 11.55,25.425 15.55,25.425 16.75,26.625 16.75,29.525 18.35,31.125 18.35,32.032 18.668,32.35 20.025,32.35 20.325,32.65 20.325,33.182 20.768,33.625 25.975,33.625 v1(26.4,34.05)
  Bottom Layer w0.1: v1(10.2,17.825) JP2_IO2.83@12.118,17.826 JP2_IO2.83@12.118,17.826
GPIO2_81: JP1_IO2.84 JP2_IO2.84 U1.D14 | length 29.9
  Top Layer w0.1: v1(14.625,17.825) JP1_IO2.84@16.718,17.826 JP1_IO2.84@16.718,17.826 ; U1.D14@32.952,28.448 v1@33.45,27.95
  MidLayer1 w0.1: v1(14.625,17.825) 27.075,17.825 33.075,23.825 33.075,27.525 v1(33.5,27.95)
  Bottom Layer w0.1: v1(14.625,17.825) 16.517,17.825 JP2_IO2.84@16.518,17.826
GPIO2_82: JP1_IO2.85 JP2_IO2.85 U1.K20 | length 37.2
  Top Layer w0.1: v1(9.325,17.025) 11.917,17.025 JP1_IO2.85@11.918,17.026 ; U1.K20@26.927,34.449 27.326,34.05 v1(27.45,34.05)
  DDR layer 1 w0.1: v1(9.325,17.025) 10.05,17.025 11.1,18.075 11.1,24 11.725,24.625 15.525,24.625 16.975,26.075 16.975,29.425 19.1,31.55 19.9,31.55 20.075,31.725 20.075,32.075 20.55,32.55 20.55,33.025 20.925,33.4 26.8,33.4 v1(27.45,34.05)
  Bottom Layer w0.1: v1(9.325,17.025) v1(9.325,17.025) JP2_IO2.85@12.118,17.026
GPIO2_83: JP1_IO2.86 JP2_IO2.86 U1.F13 | length 29.4
  Top Layer w0.1: JP1_IO2.86@16.718,17.026 18.051,17.026 v1(18.45,17.425) ; U1.F13@33.902,30.424 v1(34.375,29.95)
  MidLayer1 w0.1: v1(18.45,17.425) 26.993,17.425 31.568,22 32.575,22 33.95,23.375 33.95,29.525 v1(34.375,29.95)
  Bottom Layer w0.1: JP2_IO2.86@16.518,17.026 18.051,17.026 v1(18.45,17.425)
GPIO2_84: JP1_IO2.87 JP2_IO2.87 U1.B15 | length 30.7
  Top Layer w0.1: JP1_IO2.87@11.918,16.226 13.276,16.226 13.6,16.55 v1(13.6,17.825) ; U1.B15@31.927,26.449 32.401,25.975 v1(32.45,25.975)
  MidLayer1 w0.1: v1(13.6,17.825) 14,18.225 27.15,18.225 32.85,23.925 32.85,25.575 v1(32.45,25.975)
  Bottom Layer w0.1: JP2_IO2.87@12.118,16.226 13.276,16.226 13.6,16.55 v1(13.6,17.825)
GPIO2_85: JP1_IO2.88 JP2_IO2.88 U1.C23 | length 20.6
  Top Layer w0.1: v1(14.975,17.025) 14.975,16.425 15.174,16.226 JP1_IO2.88@16.718,16.226 ; U1.C23@23.951,27.449 U1.C23@23.927,27.449 v1@24.4,26.976
  DDR layer 1 w0.1: v1(14.975,17.025) 14.975,17.225 19.227,21.478 19.227,22.552 20.375,23.7 22.775,23.7 23.9,24.825 23.9,26.476 v1@24.4,26.976
  Bottom Layer w0.1: v1(14.975,17.025) 14.975,16.425 15.174,16.226 JP2_IO2.88@16.518,16.226 ; v1@24.4,26.95 v1@24.4,26.976
  other v1: 24.325,26.95
GPIO2_86: JP1_IO2.89 JP2_IO2.89 U1.J21 | length 35
  Top Layer w0.1: v1(10.2,16.55) 10.2,15.675 10.449,15.426 JP1_IO2.89@11.918,15.426 ; U1.J21@25.927,33.449 25.951,33.449 v1(26.4,33)
  DDR layer 1 w0.1: v1(10.2,16.55) 11.325,17.675 11.325,23.175 11.975,23.825 15.55,23.825 17.2,25.475 17.2,29.332 19.193,31.325 20,31.325 20.3,31.625 20.3,31.975 20.919,32.594 25.994,32.594 v1(26.4,33)
  Bottom Layer w0.1: v1(10.2,16.55) 10.2,15.675 10.449,15.426 JP2_IO2.89@12.118,15.426
GPIO2_87: JP1_IO2.90 JP2_IO2.90 U1.A23 | length 23.6
  Top Layer w0.1: v1(14,17.025) 14,15.9 14.474,15.426 18.201,15.426 19.025,16.25 19.025,17.675 20.125,18.775 22.95,18.775 23.525,19.35 23.525,21.95 24.15,22.575 24.15,25.226 U1.A23@23.927,25.449
  Bottom Layer w0.1: v1(14,17.025) 14,15.9 14.474,15.426 JP2_IO2.90@16.518,15.426
GPIO2_88: JP1_IO2.91 JP2_IO2.91 U1.J20 | length 39.3
  Top Layer w0.1: v1(9.325,13.825) 10.126,14.626 JP1_IO2.91@11.918,14.626 ; U1.J20@26.927,33.449 27.376,33 v1(27.45,33)
  DDR layer 1 w0.1: v1(9.325,13.825) 11.55,16.05 11.55,22.4 12.175,23.025 15.55,23.025 17.425,24.9 17.425,29.239 19.286,31.1 20.125,31.1 20.525,31.5 20.525,31.882 20.993,32.35 26.8,32.35 v1(27.45,33)
  Bottom Layer w0.1: v1(9.325,13.825) 10.126,14.626 JP2_IO2.91@12.118,14.626
GPIO2_89: JP1_IO2.92 JP2_IO2.92 U1.B23 | length 24.2
  Top Layer w0.1: v1(13.675,13.825) 14.476,14.626 18.201,14.626 19.3,15.725 19.3,17.425 20.3,18.425 23,18.425 23.85,19.275 23.85,21.825 24.375,22.35 24.375,26.001 U1.B23@23.927,26.449
  Bottom Layer w0.1: v1(13.675,13.825) 14.476,14.626 JP2_IO2.92@16.518,14.626
GPIO2_90: JP1_IO2.93 JP2_IO2.93 U1.H21 | length 34.5
  Top Layer w0.1: v1(10.2,13.825) 11.917,13.825 JP1_IO2.93@11.918,13.826 ; U1.H21@25.927,32.449 25.951,32.449 v1(26.4,31.95)
  DDR layer 1 w0.1: v1(10.2,13.825) 11.775,15.4 11.775,21.6 12.4,22.225 15.55,22.225 17.65,24.325 17.65,29.145 18.755,30.25 19.825,30.25 21.025,31.45 25.9,31.45 v1(26.4,31.95)
  Bottom Layer w0.1: v1(10.2,13.825) 12.117,13.825 JP2_IO2.93@12.118,13.826
GPIO2_91: JP1_IO2.94 JP2_IO2.94 U1.A22 | length 21.4
  Top Layer w0.1: v1(14.625,13.825) 16.717,13.825 JP1_IO2.94@16.718,13.826 18.201,13.826 19.575,15.2 19.575,17.175 20.55,18.15 23.125,18.15 24.175,19.2 24.175,21.725 24.6,22.15 24.6,23.718 24.927,24.045 U1.A22@24.927,25.449
  Bottom Layer w0.1: v1(14.625,13.825) JP2_IO2.94@16.517,13.825 ; JP2_IO2.94@16.517,13.825 JP2_IO2.94@16.518,13.826
GPIO2_92: JP1_IO2.95 JP2_IO2.95 U1.C21 | length 27
  Top Layer w0.1: JP1_IO2.95@11.918,13.026 14.049,13.026 v1(14.05,13.025) ; U1.C21@25.976,27.424 v1@26.45,26.95
  DDR layer 1 w0.1: v1(14.05,13.025) 14.45,12.625 15.4,12.625 15.825,13.05 15.825,15.8 20.127,20.102 20.127,21.652 20.625,22.15 23.725,22.15 24.125,22.55 24.125,23.75 25.4,25.025 25.4,25.9 v1@26.45,26.95
  Bottom Layer w0.1: v1(14.05,13.025) JP2_IO2.95@12.119,13.025 ; JP2_IO2.95@12.118,13.026 JP2_IO2.95@12.119,13.025
  other v1: 26.425,26.95
GPIO2_93: JP1_IO2.96 JP2_IO2.96 U1.B22 | length 22.7
  Top Layer w0.1: v1(15.15,13.025) 16.717,13.025 JP1_IO2.96@16.718,13.026 ; U1.B22@24.927,26.449 25.4,25.976 25.4,24.2 24.825,23.625 24.825,21.875 24.475,21.525 24.475,19.1 23.2,17.825 20.75,17.825 19.875,16.95 19.875,14.275 18.626,13.026 JP1_IO2.96@16.718,13.026 ; JP1_IO2.96@16.718,13.026 JP1_IO2.96@16.719,13.025
  Bottom Layer w0.1: v1(15.15,13.025) JP2_IO2.96@16.517,13.025 ; JP2_IO2.96@16.517,13.025 JP2_IO2.96@16.518,13.026
GPIO2_94: JP1_IO2.97 JP2_IO2.97 U1.C19 | length 29.7
  Top Layer w0.1: JP1_IO2.97@11.919,12.225 JP1_IO2.97@11.918,12.226 v1(13.475,12.225) ; U1.C19@27.939,27.436 v1@28.463,26.913
  DDR layer 1 w0.1: v1(13.475,12.225) 13.875,11.825 15.4,11.825 18.95,15.375 18.95,17.775 20.25,19.075 24.05,19.075 24.575,19.6 24.575,23.557 25.543,24.525 26.7,24.525 27.05,24.875 27.05,26.25 27.325,26.525 28.05,26.525 v1(28.475,26.95)
  Bottom Layer w0.1: JP2_IO2.97@12.069,12.225 JP2_IO2.97@12.094,12.25 ; JP2_IO2.97@12.117,12.225 JP2_IO2.97@12.118,12.226 v1(13.475,12.225)
GPIO2_95: JP1_IO2.98 JP2_IO2.98 U1.D19 | length 29.2
  Top Layer w0.1: v1(14.625,12.225) JP1_IO2.98@16.718,12.225 ; U1.D19@27.939,28.436 v1@28.463,27.913 ; JP1_IO2.98@16.718,12.226 JP1_IO2.98@16.719,12.225
  DDR layer 1 w0.1: v1(14.625,12.225) 15.4,12.225 16.05,12.875 16.05,15.675 20.352,19.977 20.352,21.559 20.718,21.925 23.825,21.925 24.35,22.45 24.35,23.65 26.125,25.425 26.475,25.425 26.825,25.775 26.825,27.125 27.175,27.475 28,27.475 v1(28.475,27.95)
  Bottom Layer w0.1: v1(14.625,12.225) 16.518,12.225 JP2_IO2.98@16.519,12.225
GPIO2_96: JP1_IO2.99 JP2_IO2.99 U1.A19 | length 28.6
  Top Layer w0.1: JP1_IO2.99@11.918,11.426 11.919,11.425 v1(14.05,11.425) ; U1.A19@27.927,25.449 28.426,24.95 v1(28.475,24.95)
  DDR layer 1 w0.1: v1(14.05,11.425) 14.45,11.025 15.375,11.025 19.4,15.05 19.4,17.589 20.436,18.625 25.407,18.625 25.95,19.168 25.95,21.243 28.075,23.368 28.075,24.55 v1(28.475,24.95)
  Bottom Layer w0.1: JP2_IO2.99@12.118,11.426 14.049,11.426 v1(14.05,11.425)
GPIO2_97: JP1_IO2.100 JP2_IO2.100 U1.B19 | length 27
  Top Layer w0.1: v1(15.15,11.425) 16.717,11.425 JP1_IO2.100@16.718,11.426 ; U1.B19@27.939,26.461 v1@28.463,25.938
  DDR layer 1 w0.1: v1(15.15,11.425) 15.4,11.425 19.175,15.2 19.175,17.682 20.343,18.85 24.15,18.85 24.8,19.5 24.8,22.925 25.475,23.6 26.9,23.6 27.85,24.55 27.85,25.35 v1(28.475,25.975)
  Bottom Layer w0.1: v1(15.15,11.425) 16.517,11.425 JP2_IO2.100@16.518,11.426
GPIO2_98: JP1_IO2.101 JP2_IO2.101 U1.B18 | length 30.7
  Top Layer w0.1: JP1_IO2.101@11.918,10.626 11.919,10.625 v1(13.475,10.625) ; U1.B18@28.927,26.449 29.026,26.449 v1(29.5,25.975)
  DDR layer 1 w0.1: v1(13.475,10.625) 13.875,10.225 16.2,10.225 19.85,13.875 19.85,17.389 20.636,18.175 25.6,18.175 26.4,18.975 26.4,21.05 29.1,23.75 29.1,25.575 v1(29.5,25.975)
  Bottom Layer w0.1: JP2_IO2.101@12.118,10.626 12.119,10.625 v1(13.475,10.625)
GPIO2_99: JP1_IO2.102 JP2_IO2.102 U1.C18 | length 31.1
  Top Layer w0.1: v1(14.625,10.625) 16.717,10.625 JP1_IO2.102@16.718,10.626 ; U1.C18@28.927,27.449 29.001,27.449 v1(29.5,26.95)
  DDR layer 1 w0.1: v1(14.625,10.625) 16.2,10.625 19.625,14.05 19.625,17.482 20.543,18.4 25.5,18.4 26.175,19.075 26.175,21.15 28.875,23.85 28.875,26.325 v1(29.5,26.95)
  Bottom Layer w0.1: v1(14.625,10.625) 16.517,10.625 JP2_IO2.102@16.518,10.626
GPIO2_100: JP1_IO2.103 JP2_IO2.103 U1.A17 | length 31.4
  Top Layer w0.1: JP1_IO2.103@11.918,9.826 11.919,9.825 v1(14.05,9.825) ; U1.A17@29.927,25.449 29.927,25.373 v1(30.35,24.95)
  DDR layer 1 w0.1: v1(14.05,9.825) 14.45,9.425 16.25,9.425 20.3,13.475 20.3,17.182 20.843,17.725 25.8,17.725 26.85,18.775 26.85,20.5 30.35,24 v1(30.35,24.95)
  Bottom Layer w0.1: JP2_IO2.103@12.118,9.826 12.119,9.825 v1(14.05,9.825)
GPIO2_101: JP1_IO2.104 JP2_IO2.104 U1.D18 | length 31.7
  Top Layer w0.1: v1(15.15,9.825) 16.717,9.825 JP1_IO2.104@16.718,9.826 ; U1.D18@28.927,28.449 29.001,28.449 v1(29.5,27.95)
  DDR layer 1 w0.1: v1(15.15,9.825) 16.225,9.825 20.075,13.675 20.075,17.275 20.75,17.95 25.7,17.95 26.625,18.875 26.625,20.6 29.95,23.925 29.95,27.55 v1(29.5,27.95)
  Bottom Layer w0.1: v1(15.15,9.825) 16.517,9.825 JP2_IO2.104@16.518,9.826
GPIO2_102: JP1_IO2.105 JP2_IO2.105 U1.A16 | length 31.5
  Top Layer w0.1: JP1_IO2.105@11.918,9.026 JP1_IO2.105@11.918,9.026 v1(13.475,9.025) ; U1.A16@30.927,25.449 30.927,25.423 v1(31.4,24.95)
  DDR layer 1 w0.1: v1(13.475,9.025) 13.875,8.625 16.325,8.625 20.75,13.05 20.75,16.025 22,17.275 26,17.275 27.3,18.575 27.3,19.325 30.975,23 30.975,24.525 v1(31.4,24.95)
  Bottom Layer w0.1: JP2_IO2.105@12.118,9.026 12.119,9.025 v1(13.475,9.025)
GPIO2_103: JP1_IO2.106 JP2_IO2.106 U1.B17 | length 32.3
  Top Layer w0.1: v1(14.625,9.025) JP1_IO2.106@16.718,9.026 JP1_IO2.106@16.718,9.026 ; U1.B17@29.927,26.449 29.927,26.398 v1(30.35,25.975)
  DDR layer 1 w0.1: v1(14.625,9.025) 16.275,9.025 20.525,13.275 20.525,17.075 20.95,17.5 25.9,17.5 27.075,18.675 27.075,19.419 30.75,23.094 30.75,25.575 v1(30.35,25.975)
  Bottom Layer w0.1: v1(14.625,9.025) 16.517,9.025 JP2_IO2.106@16.518,9.026
GPIO2_104: JP1_IO2.107 JP2_IO2.107 U1.A15 | length 33.4
  Top Layer w0.1: JP1_IO2.107@11.918,8.226 JP1_IO2.107@11.918,8.226 v1(14.05,8.225) ; U1.A15@31.927,25.449 31.951,25.449 v1(32.45,24.95)
  DDR layer 1 w0.1: v1(14.05,8.225) 14.45,7.825 16.325,7.825 21.2,12.7 21.2,15.839 22.186,16.825 26.2,16.825 27.75,18.375 27.75,19.125 32.025,23.4 32.025,24.525 v1(32.45,24.95)
  DDR layer 2 w0.1: v1@14.025,8.225 v1(14.05,8.225)
  Bottom Layer w0.1: JP2_IO2.107@12.118,8.226 12.119,8.225 v1(14.05,8.225)
GPIO2_105: JP1_IO2.108 JP2_IO2.108 U1.B16 | length 31.4
  Top Layer w0.1: v1(15.15,8.225) JP1_IO2.108@16.718,8.226 JP1_IO2.108@16.718,8.226 ; U1.B16@30.977,26.398 v1(31.4,25.975)
  DDR layer 1 w0.1: v1(15.15,8.225) 16.325,8.225 20.975,12.875 20.975,15.932 22.093,17.05 26.1,17.05 27.525,18.475 27.525,19.225 31.8,23.5 31.8,25.575 v1(31.4,25.975)
  Bottom Layer w0.1: v1(15.15,8.225) 16.517,8.225 JP2_IO2.108@16.518,8.226
GPIO2_106: JP1_IO2.109 JP2_IO2.109 U1.D21 | length 33
  Top Layer w0.1: JP1_IO2.109@11.918,7.426 JP1_IO2.109@11.918,7.426 v1(13.475,7.425) ; U1.D21@25.927,28.449 26.426,27.95 v1@26.45,27.95
  DDR layer 1 w0.1: v1(13.475,7.425) 13.1,7.425 12.6,7.925 12.6,12.975 13.05,13.425 15,13.425 15.35,13.775 15.35,15.653 19.902,20.206 19.902,22.252 20.675,23.025 23.075,23.025 25.175,25.125 25.175,26.15 25.775,26.75 25.775,27.275 v1@26.45,27.95
  Bottom Layer w0.1: JP2_IO2.109@12.118,7.426 12.119,7.425 v1(13.475,7.425)
  other v1: 26.4,27.95
GPIO2_107: JP1_IO2.110 JP2_IO2.110 U1.A14 | length 33.5
  Top Layer w0.1: v1(14.625,7.425) JP1_IO2.110@16.718,7.426 JP1_IO2.110@16.718,7.426 ; U1.A14@32.927,25.449 33.001,25.449 v1(33.5,24.95)
  DDR layer 1 w0.1: v1(14.625,7.425) 16.325,7.425 21.425,12.525 21.425,15.746 22.279,16.6 26.3,16.6 27.975,18.275 27.975,19.025 32.85,23.9 32.85,24.3 v1(33.5,24.95)
  Bottom Layer w0.1: v1(14.625,7.425) 16.517,7.425 JP2_IO2.110@16.518,7.426
GPIO2_108: JP1_IO2.111 JP2_IO2.111 U1.D22 | length 35.4
  Top Layer w0.1: JP1_IO2.111@11.918,6.626 JP1_IO2.111@11.918,6.626 v1(14.025,6.625) ; U1.D22@24.927,28.449 24.927,28.398 v1(25.375,27.95)
  DDR layer 1 w0.1: v1(14.025,6.625) 12.65,6.625 12.15,7.125 12.15,13.5 13.35,14.7 13.35,15.95 13.9,16.5 15.5,16.5 19.452,20.453 19.452,22.459 20.468,23.475 22.875,23.475 24.725,25.325 24.725,27.3 v1(25.375,27.95)
  Bottom Layer w0.1: JP2_IO2.111@12.118,6.626 12.119,6.625 v1(14.025,6.625)
GPIO2_109: JP1_IO2.112 JP2_IO2.112 U1.C22 | length 33.9
  Top Layer w0.1: v1@15.25,6.625 JP1_IO2.112@16.718,6.626 ; JP1_IO2.112@16.692,6.6 JP1_IO2.112@16.718,6.626 ; U1.C22@24.927,27.449 24.927,27.398 v1(25.375,26.95)
  DDR layer 1 w0.1: v1(15.175,6.625) 14.775,7.025 12.975,7.025 12.375,7.625 12.375,13.4 13.575,14.6 13.575,15.857 13.993,16.275 15.6,16.275 19.677,20.352 19.677,22.366 20.561,23.25 22.975,23.25 24.95,25.225 24.95,26.525 v1(25.375,26.95)
  Bottom Layer w0.1: v1@15.15,6.625 JP2_IO2.112@16.517,6.625 ; JP2_IO2.112@16.492,6.6 JP2_IO2.112@16.518,6.626
GPIO2_110: JP1_IO2.113 JP2_IO2.113 U1.C26 | length 32.6
  Top Layer w0.1: JP1_IO2.113@11.918,5.826 JP1_IO2.113@11.918,5.826 v1(13.475,5.825) ; U1.C26@20.927,27.449 20.927,27.398 v1(21.375,26.95)
  DDR layer 1 w0.1: v1(13.475,5.825) 12.225,5.825 11.7,6.35 11.7,13.7 12.9,14.9 12.9,17.775 13.35,18.225 15.325,18.225 18.777,21.678 18.777,26.503 19.225,26.95 v1(21.375,26.95)
  Bottom Layer w0.1: JP2_IO2.113@12.118,5.826 12.119,5.825 v1(13.475,5.825)
GPIO2_111: JP1_IO2.114 JP2_IO2.114 U1.C25 | length 33.9
  Top Layer w0.1: v1(14.625,5.825) JP1_IO2.114@16.718,5.826 JP1_IO2.114@16.718,5.826 ; U1.C25@21.927,27.449 22.4,26.975 v1(22.4,26.95)
  DDR layer 1 w0.1: v1(14.625,5.825) 14.225,6.225 12.475,6.225 11.925,6.775 11.925,13.6 13.125,14.8 13.125,17 13.55,17.425 14.85,17.425 19.002,21.578 19.002,25.052 20.475,26.525 21.975,26.525 v1(22.4,26.95)
  Bottom Layer w0.1: v1(14.625,5.825) 16.517,5.825 JP2_IO2.114@16.518,5.826
GPIO2_112: JP1_IO2.115 JP2_IO2.115 U1.G20 | length 45.5
  Top Layer w0.1: JP1_IO2.115@11.918,5.026 JP1_IO2.115@11.918,5.026 v1(14.025,5.025) ; U1.G20@26.927,31.449 27.426,30.95 v1(27.45,30.95)
  DDR layer 1 w0.1: v1(14.025,5.025) 11.75,5.025 11.25,5.525 11.25,13.914 12.45,15.114 12.45,19.35 12.925,19.825 15.575,19.825 18.325,22.575 18.325,28.057 18.543,28.275 19.925,28.275 21.1,29.45 26.625,29.45 26.9,29.725 26.9,30.4 v1(27.45,30.95)
  Bottom Layer w0.1: JP2_IO2.115@12.118,5.026 12.119,5.025 v1(14.025,5.025)
GPIO2_113: JP1_IO2.116 JP2_IO2.116 U1.D26 | length 36.3
  Top Layer w0.1: v1(15.175,5.025) JP1_IO2.116@16.718,5.026 JP1_IO2.116@16.718,5.026 ; U1.D26@20.927,28.449 20.927,28.398 v1(21.375,27.95)
  DDR layer 1 w0.1: v1(15.175,5.025) 14.775,5.425 11.95,5.425 11.475,5.9 11.475,13.8 12.675,15 12.675,18.6 13.1,19.025 15.55,19.025 18.55,22.025 18.55,27.025 18.95,27.425 19.85,27.425 20.375,27.95 v1(21.375,27.95)
  Bottom Layer w0.1: v1(15.175,5.025) 16.517,5.025 JP2_IO2.116@16.518,5.026
GPIO2_114: JP1_IO2.117 JP2_IO2.117 U1.G21 | length 45
  Top Layer w0.1: JP1_IO2.117@11.918,4.226 JP1_IO2.117@11.918,4.226 v1@13.4,4.225 ; U1.G21@25.927,31.449 v1@26.426,30.95
  DDR layer 1 w0.1: v1(13.475,4.225) 11.45,4.225 10.8,4.875 10.8,14.1 12,15.3 12,20.825 12.6,21.425 15.525,21.425 17.875,23.775 17.875,29.052 18.248,29.425 19.9,29.425 20.1,29.625 20.1,30.207 20.443,30.55 26,30.55 v1(26.4,30.95)
  Bottom Layer w0.1: v1(13.475,4.225) JP2_IO2.117@12.119,4.225 ; JP2_IO2.117@12.118,4.226 JP2_IO2.117@12.119,4.225
GPIO2_115: JP1_IO2.118 JP2_IO2.118 U1.H20 | length 48.1
  Top Layer w0.1: v1(14.625,4.225) JP1_IO2.118@16.718,4.226 JP1_IO2.118@16.718,4.226 ; U1.H20@26.927,32.449 27.426,31.95 v1(27.45,31.95)
  DDR layer 1 w0.1: v1(14.625,4.225) 14.225,4.625 11.6,4.625 11.025,5.2 11.025,14.007 12.225,15.207 12.225,20 12.85,20.625 15.525,20.625 18.1,23.2 18.1,28.15 18.45,28.5 19.825,28.5 20.325,29 20.325,30.114 20.536,30.325 26.45,30.325 26.825,30.7 26.825,31.325 v1(27.45,31.95)
  Bottom Layer w0.1: v1(14.625,4.225) JP2_IO2.118@16.517,4.225 ; JP2_IO2.118@16.517,4.225 JP2_IO2.118@16.518,4.226
IFCLK: U1.AA7 U1_USB.13 | length 58.7
  Top Layer w0.1: U1.AA7@39.927,45.449 39.899,45.449 39.913,45.435 v1(40.425,44.925) ; v1(75.9,19.2) U1_USB.13@75.9,20.05
  MidLayer1 w0.1: v1(40.425,44.925) 41.706,43.644 46.4,43.644 46.744,43.3 48.575,43.3 48.828,43.553 58.372,43.553 58.7,43.225 58.7,39.55 61.925,36.325 64.05,36.325 67.5,32.875 73.675,32.875 76.375,30.175 76.375,21.575 77.45,20.5 77.45,19.675 76.975,19.2 v1(75.9,19.2)
INIT_B/WRX: R1_FP1.2 U1.AC14 U1_USB.1 U1_USB.37 | length 113.1
  Top Layer w0.1: R1_FP1.2@31.725,52.775 32.025,52.475 32.025,51.825 32.475,51.375 32.475,47.901 U1.AC14@32.927,47.449 32.927,47.398 v1(33.425,46.9) ; v1(69.9,17) U1_USB.1@69.9,20.05 ; U1_USB.37@72.4,27.85 v1(72.4,28.625)
  DDR layer 2 w0.1: v1(33.425,46.9) 33.019,47.306 29.956,47.306 29.1,46.45 29.1,14.775 30.725,13.15 30.725,10.75 33.5,7.975 66.725,7.975 69.4,10.65 69.4,16.5 v1(69.9,17)
  Bottom Layer w0.1: v1(69.9,17) 69.9,18.375 70.325,18.8 70.325,27.775 70.9,28.35 70.9,28.725 71.25,29.075 71.55,29.075 72,28.625 v1(72.4,28.625)
LED0: R1_SW.2 U1.F9 | length 38.6
  Top Layer w0.1: U1.F9@37.927,30.449 37.927,30.423 v1(38.4,29.95)
  MidLayer1 w0.1: v1(38.4,29.95) 38.827,29.548 38.827,26.723 39.75,25.8 40.627,25.8 41.175,25.252 41.175,22.93 42.669,21.436 42.669,20.681 43.95,19.4 43.95,16.95 44.45,16.45 47.475,16.45 48.8,15.125 48.8,10.005 52.35,6.455 52.35,4.65 52.1,4.4 v1(48.775,4.4)
  Bottom Layer w0.2: v1(48.775,4.4) 48.775,3.9 R1_SW.2@49.05,3.625